# Altium PCB DT_AZP1524A1_PCB1_00A.PcbDoc (part 3 of 3)
Units mm, origin at the board's own origin, x right, y up, seen from the top; angles counter-clockwise.
Board outline 60 x 60.2 mm, 2 copper layers (Top Layer, Bottom Layer), stack 1.57 mm thick; 56 components, 46 nets, 205 pads, 364 vias.
Unrouted connection lines stored in the file: 1.
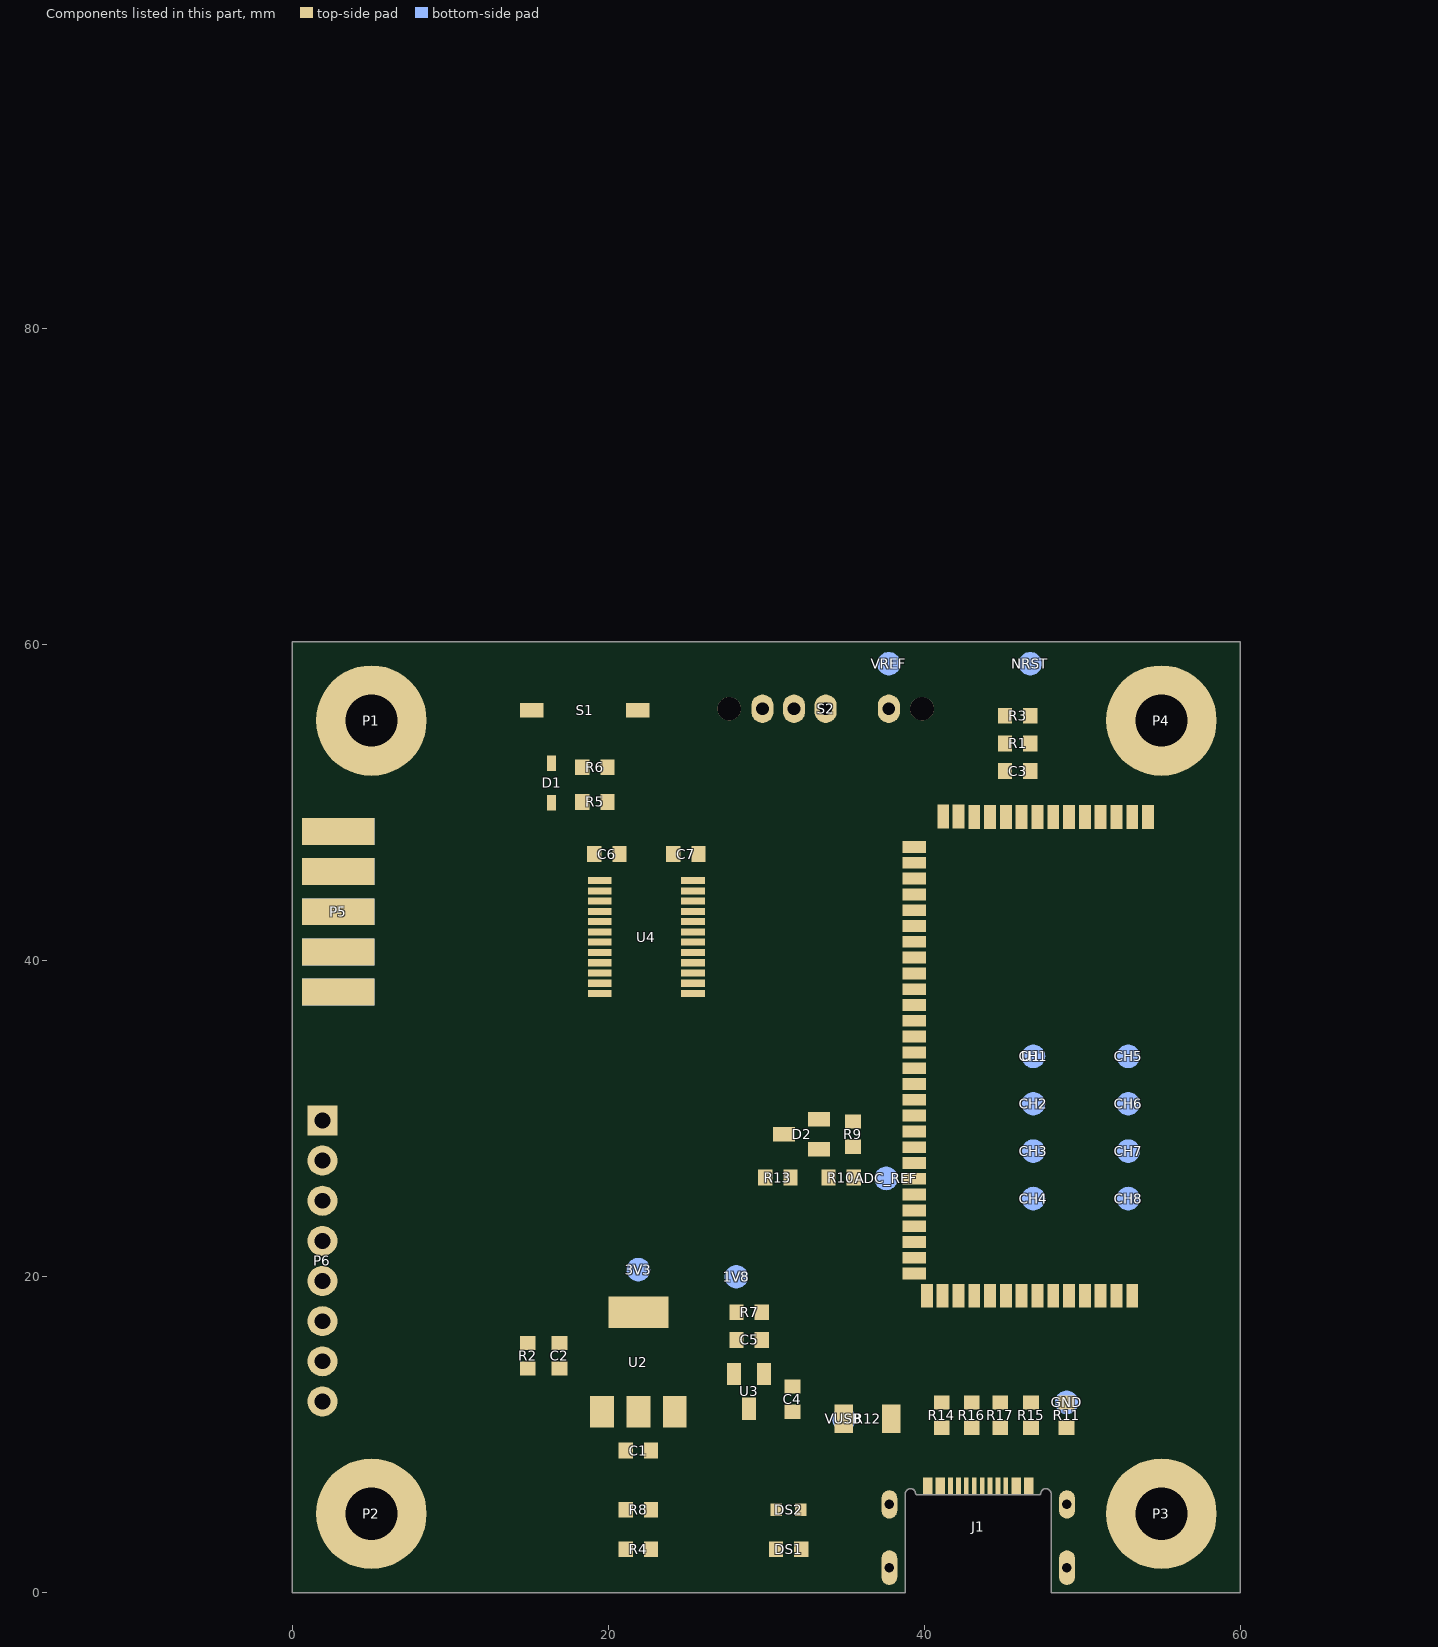
[diagram p2: the components of this part, seen from the top]

## Silkscreen, mask and mechanical layers (free items; w line width, h text height) (continued)
Selective Gold Bot:
  rectangle: -3.7,93.3 12.05,97.3
  rectangle: 0.05,89.8 12.05,93.49
  rectangle: -4.7,86.05 12.05,89.8
  rectangle: 3.3,78.55 12.05,82.3
  lines w0.2: -13.626,82.24 70.05,82.24 ; -13.626,85.99 70.05,85.99 ; -13.626,93.49 70.05,93.49 ; -13.376,89.74 70.05,89.74
  lines w0.5: -13.626,78.3 70.05,78.3 70.05,97.3 -13.626,97.3 -13.626,78.3
  text ".Company_Name" at 12.8,94.55 h3
  text "OWNER:" at -13.7,93.55 h2.7
  text ".Project_Title" at 12.8,90.55 h3
  text "PCB TITLE:" at -13.7,89.8 h2.7
  text ".Project_Document_Number" at 12.8,87.05 h3
  text ".Rev" at 59.05,87.05 h2.5
  text "PCB #:" at -13.45,86.05 h2.7
  text "REV:" at 51.3,86.009 h2.7
  text ".Plot_File_Name" at 12.8,83.3 h3
  text "GERBER FILENAME:" at -13.7,82.255 h2.7
  text "Selective Hard Gold Bottom" at 12.8,79.55 h3
  text "LAYER NAME:" at -13.7,78.55 h2.7
Top Assembly Top/Assembly Bot:
  drawing of 2896 lines, arcs and shapes, not listed
  text "Top Assembly" at 19.839,75.609 h3
  text "SCALE:" at 128.235,-138.503 h2.5
  text "TITLE:" at 37.485,-139.162 h3.5
  text "ORIG A3" at 126.735,-142.912 h3
  text ".Assembly_Project_Title" at 37.749,-146.013 h3
  text "SHEET:" at 128.235,-147.003 h2.5
  text "1 OF 2" at 128.249,-151.263 h3
  text "DRAWING NUMBER:" at -15.765,-154.662 h3.5
  text "PCB FILENAME:" at 37.485,-154.662 h3.5
  text "SCH FILENAME:" at 82.985,-154.662 h3.5
  text "REVISION:" at 126.749,-154.763 h2.5
  text ".Assembly_Document_Number" at -15.001,-158.513 h3
  text ".PCBFilename" at 37.749,-158.513 h3
  text ".Project_Document_Number" at 83.749,-158.513 h3
  text ".REV" at 130.999,-158.513 h3
  text "REV" at -83.251,-159.763 h3.5
  text "DATE" at -66.251,-159.763 h3.5
  text "ENGINEER" at -51.751,-159.763 h3.5
  text "ECO #" at -29.751,-159.763 h3.5
Bottom Assembly Top/Assembly Bot:
  drawing of 2896 lines, arcs and shapes, not listed
  text "Bottom Assembly" at 38.339,75.559 h3
  text "SCALE:" at -78.988,-138.503 h2.5
  text "TITLE:" at 11.762,-139.162 h3.5
  text "ORIG A3" at -77.488,-142.912 h3
  text ".Assembly_Project_Title" at 11.499,-146.013 h3
  text "SHEET:" at -78.988,-147.003 h2.5
  text "2 OF 2" at -79.001,-151.263 h3
  text "SCH FILENAME:" at -33.738,-154.662 h3.5
  text "PCB FILENAME:" at 11.762,-154.662 h3.5
  text "DRAWING NUMBER:" at 65.012,-154.662 h3.5
  text "REVISION:" at -77.501,-154.763 h2.5
  text ".REV" at -81.751,-158.513 h3
  text ".Project_Document_Number" at -34.501,-158.513 h3
  text ".PCBFilename" at 11.499,-158.513 h3
  text ".Assembly_Document_Number" at 64.249,-158.513 h3
  text "ECO #" at 78.999,-159.763 h3.5
  text "ENGINEER" at 100.999,-159.763 h3.5
  text "DATE" at 115.499,-159.763 h3.5
  text "REV" at 132.499,-159.763 h3.5
Top IPC Courtyard Top/IPC Courtyard Bot:
  lines w0.1: 14.145,155.775 15.145,155.775 ; 14.645,155.275 14.645,156.275
Drill Drawing:
  drawing of 3720 lines, arcs and shapes, not listed
  text "ALL DIMENSIONS IN mm" at 218.35,178.119 h2.79
  text "P C B    F A B R I C A T I O N    N O T E S" at -286.65,177.119 h5
  text "0" at 223.477,175.498 h2.79
  text "5" at 228.477,175.498 h2.79
  text "10" at 232.539,175.498 h2.79
  text "15" at 237.539,175.498 h2.79
  text "20" at 242.539,175.498 h2.79
  text "PCB制作注意事项" at -243.1,174.25 h3
  text "CONSTRUCTION" at -284.65,173.619 h3.5
  text "V-GROOVE DETAIL" at -135.325,172.369 h5
  text "Scale in Millimeters" at 223.882,170.041 h2.79
  text "IPC-6012" at -247.6,169.75 h2.79
  text "IPC-6013" at -229.85,169.75 h2.79
  text "FAB SPECIFICATION" at -284.65,169.619 h2.79
  text "MIL-SPEC P-55110" at -211.9,169.619 h2.79
  text "IPC CLASS 类" at -250.4,166.869 h2.79
  text "1" at -230.4,166.869 h2.79
  text "2" at -224.4,166.869 h2.79
  text "3" at -218.4,166.869 h2.79
  text "FAB规范" at -279.1,166.75 h2.79
  text "P-55110军用规范" at -211.85,166.75 h2.79
  text "APPLY TO PANELISED PCB IF APPLICABLE AND REQUESTED" at -152.975,166.579 h2.79
  text "LEAD-FREE RoHS3" at -284.539,164.119 h2.79
  text "FOLLOW DIRECTIVE 2011/65/EU & 2015/863/EU (ROHS 3)" at -250.989,164 h2.79
  text "无铅RoHS3" at -280.489,161.25 h2.79
  text "根据2011/65/EU欧盟指令 & 2015/863/EU (RoHS 3)" at -250.989,161.25 h2.79
  text "MATERIAL" at -284.55,158.469 h2.79
  text "(材料)" at -270.6,158.25 h2.79
  text "94 HB PAPER PHENOLIC" at -247.6,158.25 h2.79
  text "(94 HB酚醛纸)" at -216.6,158.25 h2.79
  text "FR1 PAPER PHENOLIC" at -247.6,155.5 h2.79
  text "(FR1酚醛纸)" at -218.1,155.25 h2.79
  text "PCB THICKNESS" at -133.18,155.19 h2.5
  text "V-GROOVE WIDTH" at -109.18,155.19 h2.5
  text "GAP" at -77.18,155.19 h2.5
  text "FR4 GLASS-EPOXY" at -247.6,152.75 h2.79
  text "(FR4玻璃─环氧)" at -223.1,152.75 h2.79
  text "0,80mm" at -124.305,150.704 h2.79
  text "0,16mm +/- 0,10mm" at -110.827,150.571 h2.79
  text "0,3mm +/- 0,10mm" at -84.89,150.571 h2.79
  text "FLEXI POLYIMIDE" at -247.6,150 h2.79
  text "GAP" at -141.814,149.936 h2.79
  text "(FLEXI聚酰亚胺)" at -224.6,149.75 h2.79
  text "METAL CORE" at -247.6,147.25 h2.79
  text "(金属芯)" at -229.6,147.25 h2.79
  text "1,55mm" at -124.305,146.894 h2.79
  text "0,50mm +/- 0,10mm" at -110.97,146.894 h2.79
  text "0,4mm +/- 0,10mm" at -84.935,146.894 h2.79
  text "HYBRID (REFER TO STACKUP LEGEND FOR DETAILS)" at -247.6,144.5 h2.79
  text "0,80mm +/- 0,10mm" at -110.827,143.206 h2.79
  text "0,5mm +/- 0,10mm" at -84.89,143.206 h2.79
  text "2,40mm" at -124.305,143.084 h2.79
  text "混合(参考叠层LEGEND的详细信息)" at -247.6,141.75 h2.79
  text "FINAL PCB THICKNESS" at -284.6,139 h2.79
  text "0.1mm ±0.1mm" at -247.55,138.969 h2.79
  text "MAX DEVIATION 0,10mm" at -166.31,138.639 h2.79
  text "0.2mm ±0.1mm" at -247.55,136.219 h2.79
  text "最终的PCB厚度" at -282.6,135.75 h2.79
  text "0.5mm ±0.1mm" at -247.55,133.469 h2.79
  text "0.8mm ±0.1mm" at -247.55,130.719 h2.79
  text "1.0mm ±0.1mm" at -247.55,127.969 h2.79
  text "1.2mm ±0.12mm" at -247.55,125.219 h2.79
  text "1.6mm ±0.16mm" at -247.55,122.469 h2.79
  text "2.4mm ±0.24mm" at -247.55,119.719 h2.79
  text "RELIABILITY TESTING" at -160.252,118.971 h5
  text "3.2mm ±0.32mm" at -247.55,116.969 h2.79
  text "(其他)" at -228.6,114.25 h2.79
  text "OTHER: XX mm" at -247.55,114.219 h2.79
  text "HYBRID (REFER TO STACKUP LEGEND FOR DETAILS)" at -247.55,111.469 h2.79
  text "E-TEST  100% O/S ET Test" at -157.025,110.257 h2.79
  text "混合(参考叠层LEGEND的详细信息)" at -246.1,108.75 h2.79
  text "SOLDERABILITY TEST" at -157.025,107.507 h2.79
  text "BARE" at -247.6,106.5 h2
  text "LAYER COUNT" at -284.65,105.369 h2.79
  text "1" at -233.4,105.369 h2.79
  text "2" at -227.9,105.369 h2.79
  text "4" at -221.9,105.369 h2.79
  text "6" at -215.65,105.369 h2.79
  text "8" at -209.4,105.369 h2.79
  text "10" at -203.15,105.369 h2.79
  text "12" at -196.15,105.369 h2.79
  text "OTHER___" at -188.9,105.369 h2.79
  text "(层数)" at -265.1,105.25 h2.79
  text "SOLDER FLOAT TEST" at -157.025,104.757 h2.79
  text "SUBSTRATE" at -247.6,104.75 h2
  text "其他" at -188.1,102.75 h2.79
  text "裸露基板" at -248.6,102.25 h2.5
  text "BOW & TWIST" at -157.025,102.007 h2.79
  text "SPECIAL CORES" at -284.65,99.619 h2.79
  text "YES" at -247.65,99.619 h2.79
  text "NO" at -233.65,99.619 h2.79
  text "IF YES, REFER TO STACKUP LEGEND" at -222.65,99.619 h2.79
  text "PTH THERMAL SHOCK TEST" at -157.025,99.257 h2.79
  text "BOARD EDGE" at -284.65,96.619 h2.79
  text "NO METAL BURRS AND SHARP EDGES" at -250.65,96.619 h2.79
  text "PTH COPPER THICKNESS" at -157.025,96.507 h2.79
  text "VIBRATION TEST" at -157.025,93.757 h2.79
  text "BOW & TWIST" at -284.65,93.619 h2.79
  text "1% MAX ON SMD PCBS" at -250.65,93.619 h2.79
  text "SALT SPRAY TEST" at -157.025,91.007 h2.79
  text "PROFILING" at -284.65,90.619 h2.79
  text "NC-ROUTE" at -247.65,90.619 h2.79
  text "V-SCORE" at -230.4,90.619 h2.79
  text "PUNCH" at -214.9,90.619 h2.79
  text "LASER" at -202.15,90.619 h2.79
  text "CLEANLINESS (e.g. IONIC CONC.)" at -157.025,88.257 h2.79
  text "MULTIPLE (REFER TO DRAWING)" at -247.85,87.25 h2.79
  text "OTHER: __________________________" at -157.025,85.507 h2.79
  text "CONDUCTIVE MATERIAL" at -284.65,82.869 h3.5
  text "(导电材料)" at -246.1,82.75 h2.79
  text "12um" at -247.65,78.869 h2.79
  text "17um" at -237.65,78.869 h2.79
  text "35um" at -227.65,78.869 h2.79
  text "55um" at -217.4,78.869 h2.79
  text "90um" at -207.4,78.869 h2.79
  text "___um   FINISHED" at -197.15,78.869 h2.79
  text "FINAL CU THICKNESS" at -284.35,78.75 h2.79
  text "铜厚" at -278.6,75.75 h2.79
  text "PLATING FINISH" at -284.6,73 h2.79
  text "(热风整平)" at -221.6,72.75 h2.79
  text "HASL   0.75um - 35um" at -247.65,72.619 h2.79
  text "& PARAMETERS" at -284.6,70 h2.79
  text "(镍沉金)" at -195.105,69.65 h2.79
  text "ENIG   Ni 3-6um Au 0.05um   (2umil) minimum" at -247.65,69.619 h2.79
  text "(镍沉金)" at -195.07,66.755 h2.79
  text "ENIG   Ni 3-6um Au 0.025um (1umil) minimum" at -247.65,66.619 h2.79
  text "电镀表面处理及参数" at -284.6,63.75 h2.79
  text "(银沉金)" at -202.6,63.75 h2.79
  text "ASIG   Ag 0.7-1um Au 0.03um minimum" at -247.7,63.619 h2.79
  text "(镀锡)" at -199.6,60.75 h2.79
  text "I-Sn     1um (minimum) 1.15um - 1.3um typ" at -247.65,60.619 h2.79
  text "(镀银)" at -193.6,57.75 h2.79
  text "I-Ag     0.05um (Thin) - 0.12um (Thick) minimum" at -247.65,57.55 h2.79
  text "OSP" at -247.65,54.45 h2.79
  text "SELECTIVE Au PLATING" at -284.65,51.369 h2.79
  text "NO" at -247.65,51.369 h2.79
  text "YES ON EDGE FINGERS" at -233.65,51.369 h2.79
  text "AS INDICATED" at -195.65,51.369 h2.79
  text "INTERCONNECTS" at -284.6,45.5 h3.5
  text "DRILL PROCESS" at -284.6,41.5 h2.79
  text "THT" at -247.6,41.5 h2.79
  text "BLIND & BURIED VIAS" at -233.6,41.5 h2.79
  text "LASER VIAS" at -195.6,41.5 h2.79
  text "HOLE WALL PLATING" at -284.6,38.5 h2.79
  text "AS SPECIFIED IN IPC-6012 CLASS" at -250.6,38.5 h2.79
  text "AS PER TABLE, AFTER TH PLATING (TOL -0.0mm +0.1mm)" at -250.583,35.528 h2.79
  text "FINAL HOLE SIZE" at -284.6,35.5 h2.79
  text "MIN HOLE SIZE (mm)" at -284.6,32.5 h2.79
  text "0.10" at -247.6,32.5 h2.79
  text "0.15" at -233.6,32.5 h2.79
  text "0.2" at -219.6,32.5 h2.79
  text "0.25" at -205.6,32.5 h2.79
  text "LARGER" at -191.6,32.5 h2.79
  text "QTY SIGNAL LAYERS" at -285.1,29.431 h2.79
  text "0" at -247.6,29.431 h2.79
  text "1" at -240.6,29.431 h2.79
  text "2" at -233.6,29.431 h2.79
  text "3" at -226.6,29.431 h2.79
  text "4" at -219.6,29.431 h2.79
  text "5" at -212.6,29.431 h2.79
  text "6" at -205.6,29.431 h2.79
  text "7" at -198.6,29.431 h2.79
  text "8" at -191.6,29.431 h2.79
  text "9" at -185.1,29.431 h2.79
  text "10" at -178.1,29.431 h2.79
  text "QTY COPPER PLANES" at -285.1,26.431 h2.79
  text "0" at -247.6,26.431 h2.79
  text "1" at -240.6,26.431 h2.79
  text "2" at -233.6,26.431 h2.79
  text "3" at -226.6,26.431 h2.79
  text "4" at -219.6,26.431 h2.79
  text "5" at -212.6,26.431 h2.79
  text "6" at -205.6,26.431 h2.79
  text "MIN TRACE WIDTH (mm)" at -285.1,23.431 h2.79
  text "0.10" at -247.6,23.431 h2.79
  text "0.15" at -233.6,23.431 h2.79
  text "0.2" at -219.6,23.431 h2.79
  text "0.3" at -205.6,23.431 h2.79
  text "LARGER" at -191.6,23.431 h2.79
  text "MIN TRACE SPACING (mm)" at -285.1,20.431 h2.79
  text "0.10" at -247.6,20.431 h2.79
  text "0.15" at -233.6,20.431 h2.79
  text "0.2" at -219.6,20.431 h2.79
  text "0.3" at -205.6,20.431 h2.79
  text "LARGER" at -191.6,20.431 h2.79
  text "COSMETICS" at -284.65,15.619 h3.5
  text "SOLDERMASK" at -284.6,12.25 h2.79
  text "PLACEMENT ACCURACY" at -284.85,9.75 h2.79
  text "75um" at -247.65,9.619 h2.79
  text "100um" at -233.65,9.619 h2.79
  text "150um" at -219.65,9.619 h2.79
  text "SOLDERMASK SIDES" at -284.65,6.619 h2.79
  text "TOP" at -247.65,6.619 h2.79
  text "BOT" at -233.65,6.619 h2.79
  text "BOTH SIDES" at -219.65,6.619 h2.79
  text "SOLDER MASK TYPE" at -284.65,3.619 h2.79
  text "SOLDER MASK OVER BARE COPPER (SMOBC)" at -250.65,3.619 h2.79
  text "ORANGE" at -186.05,0.7 h2.79
  text "SOLDER MASK COLOUR" at -284.65,0.619 h2.79
  text "GRN" at -247.65,0.619 h2.79
  text "BLUE" at -238.15,0.619 h2.79
  text "YEL" at -227.9,0.619 h2.79
  text "RED" at -219.15,0.619 h2.79
  text "BLACK" at -197.65,0.619 h2.79
  text "WHITE" at -209.8,0.6 h2.79
  text "阻焊颜色" at -278.6,-2.25 h2.79
  text "绿色" at -248.1,-2.25 h2.79
  text "蓝色" at -238.6,-2.25 h2.79
  text "黄色" at -228.6,-2.25 h2.79
  text "红色" at -219.6,-2.25 h2.79
  text "白色" at -208.1,-2.25 h2.79
  text "黑色" at -197.1,-2.25 h2.79
  text "橙色" at -184.1,-2.25 h2.79
  text "SOLDERMASK WEBBING" at -284.65,-4.881 h2.79
  text "GANG RELIEF NOT ALLOWED, UNLESS BELOW CAPABILITY" at -250.65,-4.881 h2.79
  text "SILKSCREEN COLOUR" at -284.6,-7.881 h2.79
  text "WHITE" at -247.6,-7.881 h2.79
  text "YEL" at -233.6,-7.881 h2.79
  text "BLACK" at -223.6,-7.881 h2.79
  text "OTHER ____________" at -203.1,-7.881 h2.79
  text "丝印颜色" at -279.6,-10.75 h2.79
  text "白色" at -246.6,-10.75 h2.79
  text "黄色" at -234.1,-10.75 h2.79
  text "黑色" at -223.1,-10.75 h2.79
  text "其他" at -202.6,-10.75 h2.79
  text "SILKSCREEN PRINT" at -284.6,-13.381 h2.79
  text "NO LEGEND TO BE APPLIED OVER SOLDER PADS" at -250.6,-13.381 h2.79
  text "SILKSCREEN QTY" at -284.6,-16.381 h2.79
  text "TOP" at -247.6,-16.381 h2.79
  text "BOT" at -233.6,-16.381 h2.79
  text "BOTH SIDES" at -219.6,-16.381 h2.79
  text "NONE" at -191.6,-16.381 h2.79
  text "SILKSCREEN LINE WIDTH" at -284.6,-19.381 h2.79
  text "0.15mm" at -247.6,-19.381 h2.79
  text "0.2mm" at -233.6,-19.381 h2.79
  text "SILKSCREEN OVER PADS" at -284.6,-22.381 h2.79
  text "NOT PERMITTED, PLEASE REMOVE IF PRESENT" at -250.6,-22.381 h2.79
  text "MANUFACTURING DEVIATIONS" at -284.6,-27.631 h3.5
  text "PAD REMOVAL" at -284.6,-31.631 h2.79
  text "ALLOWED ON UNUSED PADS ON INNER LAYERS" at -250.6,-31.631 h2.79
  text "TEARDROPPING" at -284.6,-34.631 h2.79
  text "PREFERRED" at -250.6,-34.631 h2.79
  text "Cu THIEVING" at -284.6,-37.631 h2.79
  text "ALLOWED ON PANEL STRIPS" at -250.6,-37.631 h2.79
  text "VIA SIZE REDUCTION" at -284.6,-40.631 h2.79
  text "NOT ALLOWED" at -250.6,-40.631 h2.79
  text "ADDITIONAL REQUIREMENTS" at -284.6,-47.631 h3.5
  text "ELECTRICAL TEST" at -284.6,-51.631 h2.79
  text "NONE" at -247.6,-51.631 h2.79
  text "FIXTURE" at -233.6,-51.631 h2.79
  text "FLYING PROBE" at -215.6,-51.631 h2.79
  text "MANUFACTURER LOGO" at -284.6,-54.631 h2.79
  text "YES" at -247.6,-54.631 h2.79
  text "NO" at -233.6,-54.631 h2.79
  text "BATCH No ON S/SCREEN" at -284.6,-57.631 h2.79
  text "YES" at -247.6,-57.631 h2.79
  text "NO" at -233.6,-57.631 h2.79
  text "CERTIFICATE REQ'D" at -284.6,-60.631 h2.79
  text "E-TEST" at -247.6,-60.631 h2.79
  text "UL" at -233.6,-60.631 h2.79
  text "IPC-6011/12" at -221.6,-60.631 h2.79
  text "MIL-SPEC P-55110" at -201.6,-60.631 h2.79
  text "MANUFACTURING DATA" at -286.65,-66.631 h3.5
  text "FILENAME.EXT:" at -250.93,-71.56 h3.5
  text ".GERBER_FILENAME" at -223.93,-71.56 h3.5
  text "GERBER DATA" at -284.65,-71.631 h3.5
  text "TOP COPPER" at -284.65,-75.631 h2.79
  text "YES" at -242.65,-75.631 h2.79
  text "NO" at -230.65,-75.631 h2.79
  text ". GTL" at -221.65,-75.631 h2.79
  text "BOTTOM COPPER" at -284.65,-78.631 h2.79
  text "YES" at -242.65,-78.631 h2.79
  text "NO" at -230.65,-78.631 h2.79
  text ". GBL" at -221.65,-78.631 h2.79
  text "TOP SOLDER MASK" at -284.65,-83.631 h2.79
  text "YES" at -242.65,-83.631 h2.79
  text "NO" at -230.65,-83.631 h2.79
  text ". GTS" at -221.65,-83.631 h2.79
  text "BOTTOM SOLDER MASK" at -284.65,-86.631 h2.79
  text "YES" at -242.65,-86.631 h2.79
  text "NO" at -230.65,-86.631 h2.79
  text ". GBS" at -221.65,-86.631 h2.79
  text "TOP OVERLAY" at -284.65,-89.631 h2.79
  text "YES" at -242.65,-89.631 h2.79
  text "NO" at -230.65,-89.631 h2.79
  text ". GTO" at -221.65,-89.631 h2.79
  text "BOTTOM OVERLAY" at -284.65,-92.631 h2.79
  text "YES" at -242.65,-92.631 h2.79
  text "NO" at -230.65,-92.631 h2.79
  text ". GBO" at -221.65,-92.631 h2.79
  text "TOP SOLDER PASTE" at -284.65,-95.631 h2.79
  text "YES" at -242.65,-95.631 h2.79
  text "NO" at -230.65,-95.631 h2.79
  text ". GTP" at -221.65,-95.631 h2.79
  text "BOTTOM SOLDER PASTE" at -284.65,-98.631 h2.79
  text "YES" at -242.65,-98.631 h2.79
  text "NO" at -230.65,-98.631 h2.79
  text ". GBP" at -221.65,-98.631 h2.79
  text "TOP SELECTIVE GOLD" at -284.65,-101.631 h2.79
  text "YES" at -242.65,-101.631 h2.79
  text "NO" at -230.65,-101.631 h2.79
  text ". GTG" at -221.65,-101.631 h2.79
  text "BOTTOM SELECTIVE GOLD" at -284.65,-104.631 h2.79
  text "YES" at -242.65,-104.631 h2.79
  text "NO" at -230.65,-104.631 h2.79
  text ". GBG" at -221.65,-104.631 h2.79
  text "TOP PEELABLE BLUE" at -284.65,-107.631 h2.79
  text "YES" at -242.65,-107.631 h2.79
  text "NO" at -230.65,-107.631 h2.79
  text ". GTB" at -221.65,-107.631 h2.79
  text "BOTTOM PEELABLE BLUE" at -284.65,-110.631 h2.79
  text "YES" at -242.65,-110.631 h2.79
  text "NO" at -230.65,-110.631 h2.79
  text ". GBB" at -221.65,-110.631 h2.79
  text "PCB OUTLINE" at -284.6,-113.75 h2.79
  text "YES" at -242.6,-113.75 h2.79
  text "NO" at -230.6,-113.75 h2.79
  text ". GM1" at -221.6,-113.75 h2.79
  text "DRILL GUIDE" at -284.6,-116.75 h2.79
  text "YES" at -242.6,-116.75 h2.79
  text "NO" at -230.6,-116.75 h2.79
  text ". GG1" at -221.6,-116.75 h2.79
  text "YES" at -242.6,-119.75 h2.79
  text "NO" at -230.6,-119.75 h2.79
  text ". GD1" at -221.6,-119.75 h2.79
  text "MANUFACTURING/ / DRILL DRAWING" at -284.603,-121.784 h2.79
  text ".GERBER_FILENAME" at -223.93,-124.979 h2.5
  text "-RoundHoles.TXT" at -194.33,-124.979 h2.5
  text "YES" at -242.65,-125 h2.79
  text "NO" at -230.65,-125 h2.79
  text "DRILL SET #1 (ROUND)" at -284.65,-125.131 h2.79
  text "DRILL SET #2 (SLOTS)" at -284.65,-128.131 h2.79
  text ".GERBER_FILENAME" at -223.98,-128.229 h2.5
  text "-SlotHoles.TXT" at -194.38,-128.229 h2.5
  text "YES" at -242.65,-128.25 h2.79
  text "NO" at -230.65,-128.25 h2.79
  text "Symbol" at -154.166,-131.523 h1.83
  text "Hit Count" at -142.543,-131.523 h1.83
  text "Finished Hole Size" at -127.734,-131.523 h1.83
  text "Plated" at -102.137,-131.523 h1.83
  text "Hole Type" at -92.056,-131.523 h1.83
  text "Physical Length" at -77.09,-131.523 h1.83
  text "Rout Path Length" at -53.116,-131.523 h1.83
  text "Drill Layer Pair" at -28.469,-131.523 h1.83
  text ".ZIP" at -208.6,-135 h2.79
  text ".GERBER_FILENAME" at -241.68,-135.06 h2.79
  text "MANUFACTURING ZIP FILENAME:" at -284.65,-135.131 h2.79
  text "364" at -142.543,-135.333 h1.52
  text "0.400mm (15.75mil)" at -127.734,-135.333 h1.52
  text "PTH" at -102.137,-135.333 h1.52
  text "Round" at -92.056,-135.333 h1.52
  text "-" at -77.09,-135.333 h1.52
  text "-" at -53.116,-135.333 h1.52
  text "Top Layer - Bottom Layer" at -28.469,-135.333 h1.52
  text "A" at -154.905,-135.587 h1.69
  text "THIS DOCUMENT IS THE PROPERTY OF AZOTEQ,  AND MAY NOT BE COPIED OR USED FOR ANY PURPOSE OTHER THAN THAT FOR WHICH IT IS SUPPLIED WITHOUT PERMISSION IN WRITING FROM THE OWNER." at 248.32,-136.31 h3 r90
  text "2" at -142.543,-139.143 h1.52
  text "0.600mm (23.62mil)" at -127.734,-139.143 h1.52
  text "PTH" at -102.137,-139.143 h1.52
  text "Slot" at -92.056,-139.143 h1.52
  text "1.400mm (55.12mil)" at -77.09,-139.143 h1.52
  text "0.800mm (31.50mil)" at -53.116,-139.143 h1.52
  text "Top Layer - Bottom Layer" at -28.469,-139.143 h1.52
  text "B" at -154.905,-139.397 h1.69
  text "2" at -142.543,-142.953 h1.52
  text "0.600mm (23.62mil)" at -127.734,-142.953 h1.52
  text "PTH" at -102.137,-142.953 h1.52
  text "Slot" at -92.056,-142.953 h1.52
  text "1.800mm (70.87mil)" at -77.09,-142.953 h1.52
  text "1.200mm (47.24mil)" at -53.116,-142.953 h1.52
  text "Top Layer - Bottom Layer" at -28.469,-142.953 h1.52
  text "C" at -154.905,-143.207 h1.69
  text ".COPYRIGHT_YEAR" at 248.32,-143.91 h3 r90
  text "4" at -142.543,-146.763 h1.52
  text "0.800mm (31.50mil)" at -127.734,-146.763 h1.52
  text "PTH" at -102.137,-146.763 h1.52
  text "Round" at -92.056,-146.763 h1.52
  text "-" at -77.09,-146.763 h1.52
  text "-" at -53.116,-146.763 h1.52
  text "Top Layer - Bottom Layer" at -28.469,-146.763 h1.52
  text "D" at -154.905,-147.017 h1.69
  text "C" at 248.62,-147.71 h3 r90
  text "8" at -142.543,-150.573 h1.52
  text "1.000mm (39.37mil)" at -127.734,-150.573 h1.52
  text "PTH" at -102.137,-150.573 h1.52
  text "Round" at -92.056,-150.573 h1.52
  text "-" at -77.09,-150.573 h1.52
  text "-" at -53.116,-150.573 h1.52
  text "Top Layer - Bottom Layer" at -28.469,-150.573 h1.52
  text "E" at -154.905,-150.827 h1.69
  text "SPECIAL INSTRUCTIONS" at -286.65,-153.381 h3.5
  text "2" at -142.543,-154.383 h1.52
  text "1.500mm (59.06mil)" at -127.734,-154.383 h1.52
  text "NPTH" at -102.137,-154.383 h1.52
  text "Round" at -92.056,-154.383 h1.52
  text "-" at -77.09,-154.383 h1.52
  text "-" at -53.116,-154.383 h1.52
  text "Top Layer - Bottom Layer" at -28.469,-154.383 h1.52
  text "F" at -154.905,-154.637 h1.69
  text "SCALE:" at 240.807,-158.05 h2.5
  text "CRITICAL DIMENSION  (CD)" at -284.525,-158.131 h2.79
  text "NO" at -242.525,-158.131 h2.79
  text "YES  (REFER TO DRAWING)" at -230.525,-158.131 h2.79
  text "4" at -142.543,-158.193 h1.52
  text "3.300mm (129.92mil)" at -127.734,-158.193 h1.52
  text "PTH" at -102.137,-158.193 h1.52
  text "Round" at -92.056,-158.193 h1.52
  text "-" at -77.09,-158.193 h1.52
  text "-" at -53.116,-158.193 h1.52
  text "Top Layer - Bottom Layer" at -28.469,-158.193 h1.52
  text "G" at -154.905,-158.447 h1.69
  text "TITLE:" at 150.057,-158.709 h3.5
  text "STANDARD - 2 LAYER - PCB TEMPLATE" at 186.2,-160 h2.5
  text "386 Total" at -142.543,-162.003 h1.52
  text "ORIG A2" at 239.307,-162.459 h3
  text ".Project_Title" at 150.32,-165.56 h3
  text "Slot definitions :" at -154.166,-165.758 h1.52
  text "Rout Path Length" at -135.486,-165.758 h1.52
  text "= Calculated from tool start centre position to tool end centre position." at -115.674,-165.758 h1.52
  text "SHEET:" at 240.807,-166.55 h2.5
  text "Physical Length" at -135.486,-168.37 h1.52
  text "= Rout Path Length + Tool Size = Slot length as defined in the PCB layout" at -117.909,-168.37 h1.52
  text "1 OF 13" at 240.82,-170.81 h3
  text "DRAWING NUMBER:" at 96.807,-174.209 h3.5
  text "PCB FILENAME:" at 150.057,-174.209 h3.5
  text "SCH FILENAME:" at 195.557,-174.209 h3.5
  text "REVISION:" at 239.32,-174.31 h2.5
  text ".Project_Document_Number" at 97.57,-178.06 h3
  text ".PCBFilename" at 150.32,-178.06 h3
  text ".Project_Document_Number" at 196.32,-178.06 h3
  text ".REV" at 243.57,-178.06 h3
  text ".Print_Date" at -19.025,-178.331 h2.79
  text ".Print_Time" at -4.525,-178.331 h2.79
  text "DATESTAMP OF THIS PRINT:" at -55.025,-178.831 h2.75
  text "V05.2" at -284.85,-179 h3
  text "REV" at 29.32,-179.31 h3.5
  text "DATE" at 46.32,-179.31 h3.5
  text "ENGINEER" at 60.82,-179.31 h3.5
  text "ECO #" at 82.82,-179.31 h3.5
TESTPOINT/TEST JIG LAYER:
  rectangle: 3.3,78.581 12.05,82.331
  rectangle: 0.05,89.831 12.05,93.521
  rectangle: -3.7,93.331 12.05,97.331
  rectangle: -4.7,86.081 12.05,89.831
  lines w0.2: -13.626,82.271 70.05,82.271 ; -13.626,86.021 70.05,86.021 ; -13.626,93.521 70.05,93.521 ; -13.376,89.771 70.05,89.771
  lines w0.5: -13.626,78.331 70.05,78.331 70.05,97.331 -13.626,97.331 -13.626,78.331
  text ".Company_Name" at 12.8,94.581 h3
  text "OWNER:" at -13.7,93.581 h2.7
  text ".Project_Title" at 12.8,90.581 h3
  text "PCB TITLE:" at -13.7,89.831 h2.7
  text ".Project_Document_Number" at 12.8,87.081 h3
  text ".Rev" at 59.05,87.081 h2.5
  text "PCB #:" at -13.45,86.081 h2.7
  text "REV:" at 51.3,86.04 h2.7
  text ".Plot_File_Name" at 12.8,83.331 h3
  text "GERBER FILENAME:" at -13.7,82.286 h2.7
  text "TESTPOINT/TEST JIG LAYER" at 12.8,79.581 h3
  text "LAYER NAME:" at -13.7,78.581 h2.7

## Dimensions
43.746,-1.985 to 41.706,-7.7 on Drill Drawing
-0.285,33.574 to -4,33.6 on Drill Drawing
23.952,-0.536 to 21.717,-3.591 on Drill Drawing
29.404,61.2 to 29.388,63.7 on Drill Drawing
60.55,30.185 to 63.05,30.2 on Drill Drawing
0,0 to -4.55,-5.05 on Drill Drawing
0,60.2 to 0,0 on Drill Drawing
0,60.2 to 60,60.2 on Drill Drawing

## Text inside footprints (layer, text, board x,y; h text height)
D2: Top Assembly Top/Assembly Bot "2" at 34.025,29.7 h1.5 r90; Top Assembly Top/Assembly Bot "1" at 33.975,27.875 h1.5 r90
P5: Top Assembly Top/Assembly Bot "9" at 3.55,47.75 h1.4; Top Assembly Top/Assembly Bot "1" at 3.55,37.55 h1.4; Bottom Assembly Top/Assembly Bot "2" at 3.2,37.6 h1.4; Bottom Assembly Top/Assembly Bot "10" at 3.6,47.75 h1.4
P6: Top Assembly Top/Assembly Bot "8" at 1.5,11.75 h1.5; Top Assembly Top/Assembly Bot "1" at 1.7,29.45 h1.5
S2: Top Assembly Top/Assembly Bot "1" at 37.5,55.5 h0.9; Top Assembly Top/Assembly Bot "2" at 33.5,55.55 h0.9; Top Assembly Top/Assembly Bot "3" at 31.525,55.5 h0.9; Top Assembly Top/Assembly Bot "4" at 29.4,55.55 h0.9
U1: Top Overlay "15" at 36.612,46.55 h0.9; Top Overlay "42" at 36.537,19.6 h0.9; Top Overlay "1" at 53.893,50.15 h0.9; Top Overlay "56" at 52.729,16.45 h0.9
U2: Top Assembly Top/Assembly Bot "2" at 21.555,17.36 h1.5; Top Assembly Top/Assembly Bot "1" at 19.4,10.85 h1.5; Top Assembly Top/Assembly Bot "2" at 21.65,10.85 h1.5; Top Assembly Top/Assembly Bot "3" at 23.9,10.85 h1.5
U3: Top Assembly Top/Assembly Bot "1" at 29.6,13.65 h1.5; Top Assembly Top/Assembly Bot "2" at 27.65,13.75 h1.5
U4: Top Assembly Top/Assembly Bot "12" at 19.2,37.75 h1.5; Top Assembly Top/Assembly Bot "1" at 19.4,44.4 h1.5